# EAGLE board Project_04_Board (EAGLE 9.6.2)
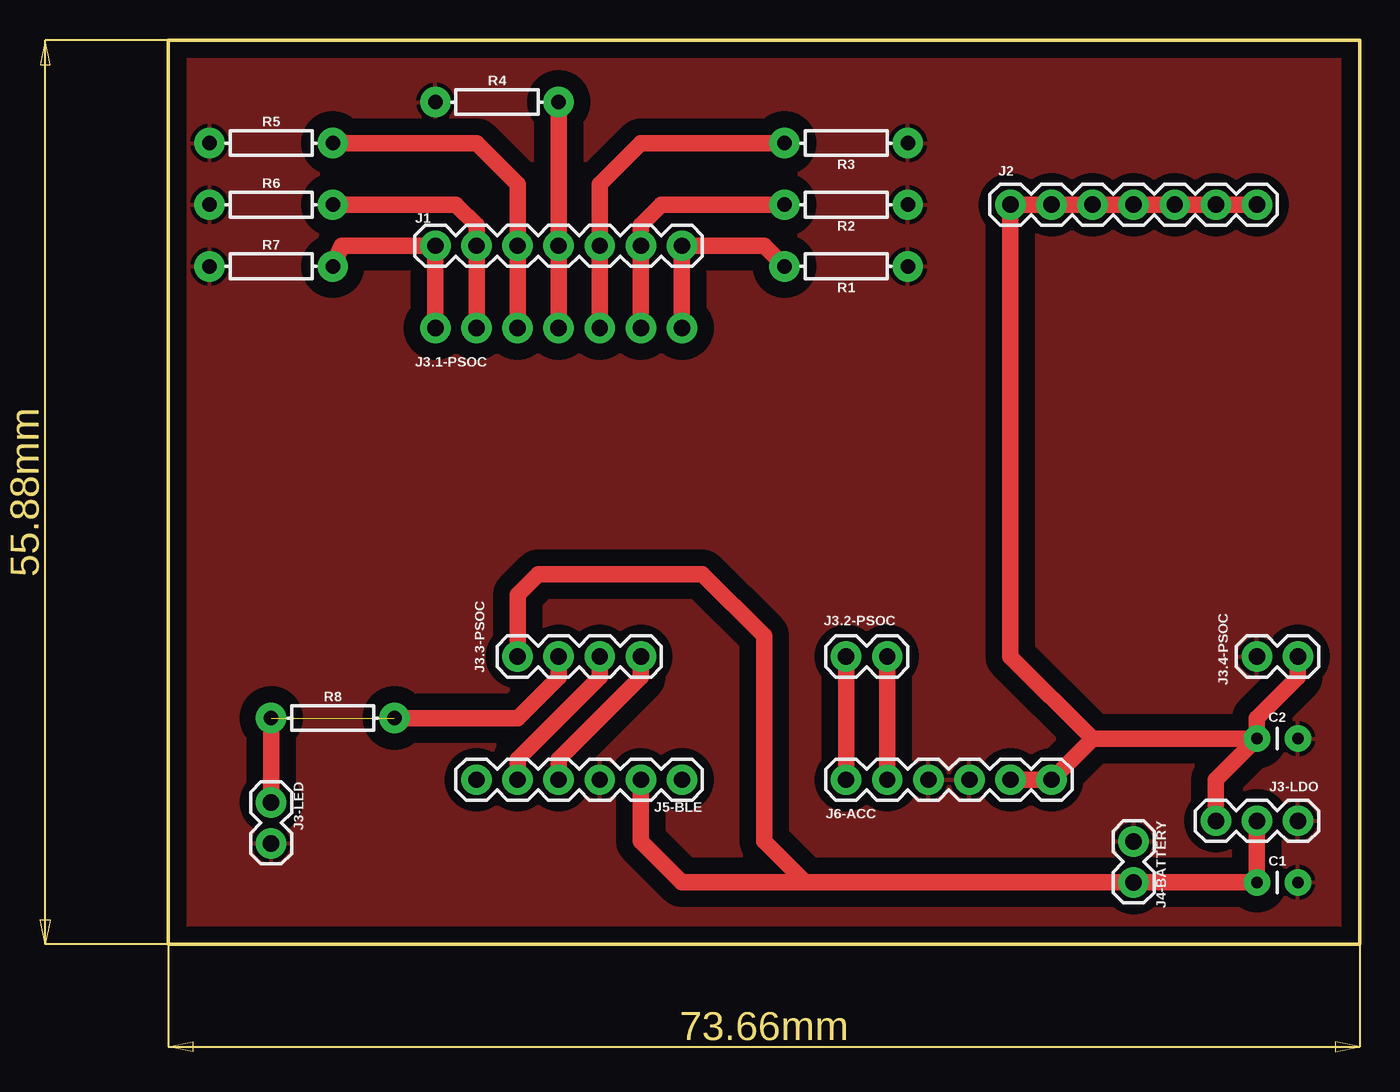
[diagram p0: board, top side]
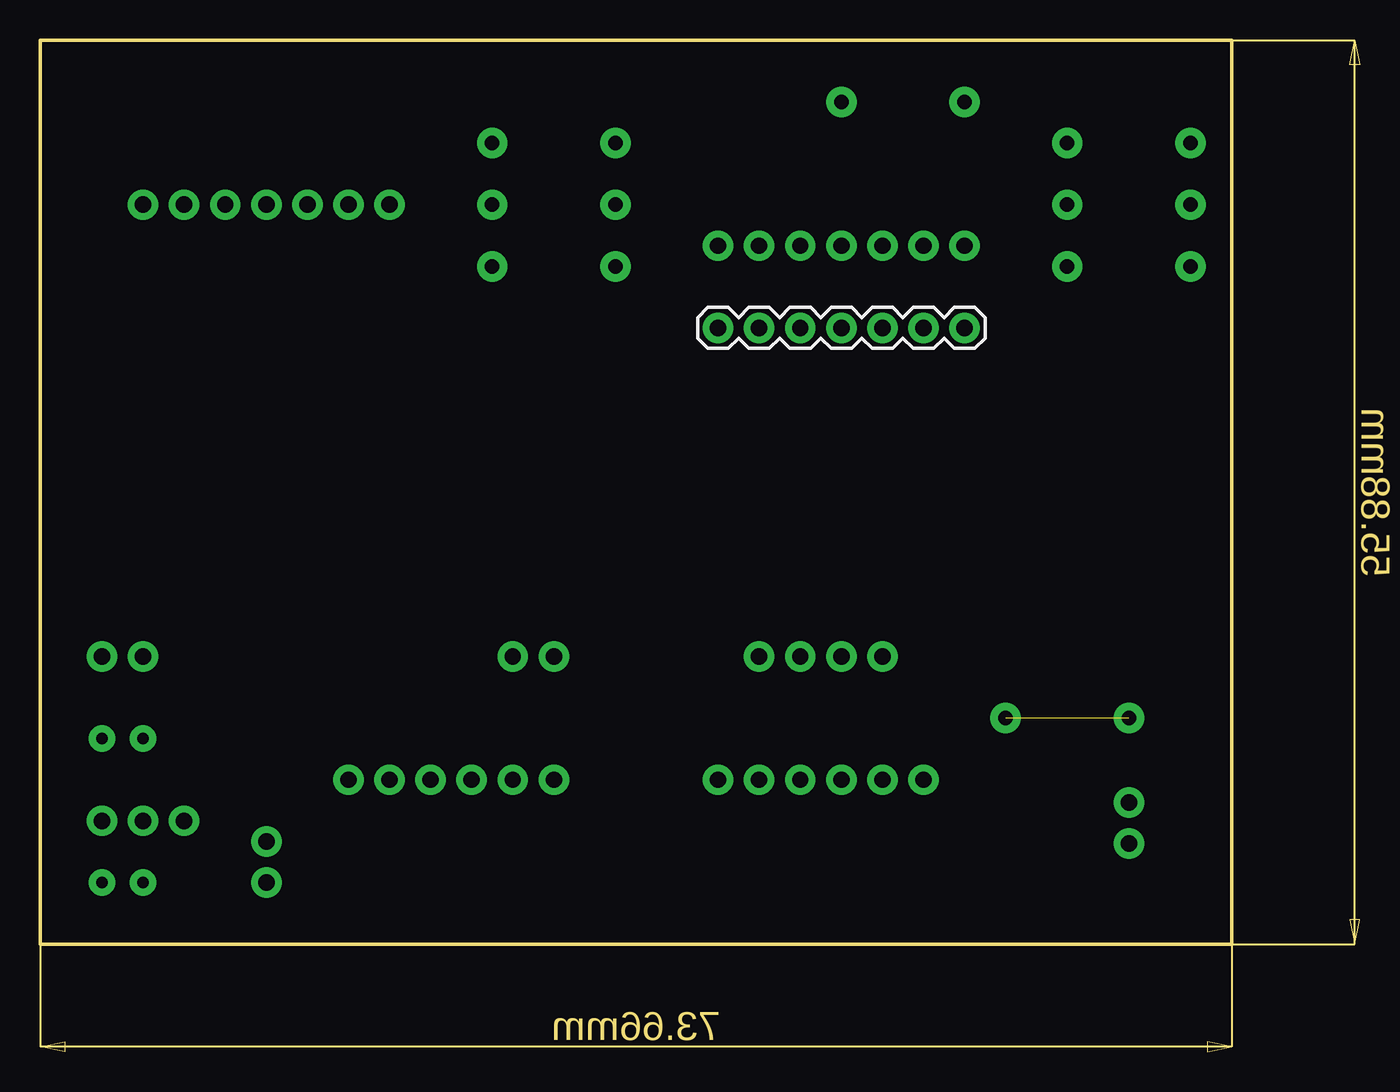
[diagram p1: board, bottom side, seen from below]

Size 73.66 x 55.88 mm. Coordinates in mm from the lower left corner, seen from the top.
Outline: 0,0 73.66,0 73.66,55.88 0,55.88 0,0
Copper layers (1*16): Top 0.035mm / dielectric 1.5mm / Bottom 0.035mm
Design rules "sparkfun": minimum track width 8mil, minimum drill 20mil, track to track 8mil, track to pad 8mil, pad to pad 8mil, via to via 8mil, smd to smd 8mil, copper to edge 8mil, drill to drill 8mil, minimum pad ring 12mil, minimum via ring 10mil, stop-mask expansion 4mil, vias tented up to drill 20mil, thermal gap 10mil

## Footprints (pad centres in the part's own frame; a part is rotated, then mirrored left to right if it is on the bottom)
CAP-PTH-2.54 = drill 0.7 pad 1.651: 1 -1.27,0; 2 1.27,0
1X07 = drill 1.016 pad 1.88: 1 0,0; 2 2.54,0; 3 5.08,0; 4 7.62,0; 5 10.16,0; 6 12.7,0; 7 15.24,0
1X03 = drill 1.016 pad 1.88: 1 0,0; 2 2.54,0; 3 5.08,0
1X02 = drill 1.016 pad 1.88: 1 0,0; 2 2.54,0
1X04 = drill 1.016 pad 1.88: 1 0,0; 2 2.54,0; 3 5.08,0; 4 7.62,0
1X06 = drill 1.016 pad 1.88: 1 0,0; 2 2.54,0; 3 5.08,0; 4 7.62,0; 5 10.16,0; 6 12.7,0
AXIAL-0.3 = drill 0.9 pad 1.88: P$1 -3.81,0; P$2 3.81,0

## Placement (x,y rotation side)
C1  1uF  [CAP-PTH-2.54]  68.58,3.81 0 top
C2  1uF  [CAP-PTH-2.54]  68.58,12.7 0 top
J1  [1X07]  16.51,43.18 0 top
J2  [1X07]  52.07,45.72 0 top
J3-LDO  [1X03]  69.85,7.62 180 top
J3-LED  [1X02]  6.35,8.76 270 top
J3.1-PSOC  [1X07]  31.75,38.1 0 bottom
J3.2-PSOC  [1X02]  41.91,17.78 0 top
J3.3-PSOC  [1X04]  21.59,17.78 0 top
J3.4-PSOC  [1X02]  67.31,17.78 0 top
J4-BATTERY  [1X02]  59.69,6.35 270 top
J5-BLE  [1X06]  31.75,10.16 180 top
J6-ACC  [1X06]  41.91,10.16 0 top
R1  27K  [AXIAL-0.3]  41.91,41.91 180 top
R2  27K  [AXIAL-0.3]  41.91,45.72 180 top
R3  27K  [AXIAL-0.3]  41.91,49.53 180 top
R4  27K  [AXIAL-0.3]  20.32,52.07 0 top
R5  27K  [AXIAL-0.3]  6.35,49.53 0 top
R6  10K  [AXIAL-0.3]  6.35,45.72 0 top
R7  10K  [AXIAL-0.3]  6.35,41.91 0 top
R8  330  [AXIAL-0.3]  10.16,13.97 0 top

## Library data of the parts
C1 C2 = SparkFun-Capacitors; PROD_ID: CAP-09128
J1 J2 J3-LED J3.1-PSOC J3.2-PSOC J3.4-PSOC J4-BATTERY = SparkFun-Connectors
J3-LDO = SparkFun-Connectors; PROD_ID: XXX-00000
J3.3-PSOC = SparkFun-Connectors; PROD_ID: CONN-09696
J5-BLE J6-ACC = SparkFun-Connectors; PROD_ID: CONN-08437
R1-R8 = SparkFun-Resistors

## Nets
3.3V: C2.1 J2.1 J2.2 J2.3 J2.4 J2.5 J2.6 J2.7 J3-LDO.3 J3.4-PSOC.2 J6-ACC.5 J6-ACC.6
4.5V: C1.1 J3-LDO.2 J3.3-PSOC.1 J4-BATTERY.2 J5-BLE.2
GND: C1.2 C2.2 J3-LDO.1 J3-LED.2 J3.4-PSOC.1 J4-BATTERY.1 J5-BLE.3 J6-ACC.3 J6-ACC.4 R1.P$1 R2.P$1 R3.P$1 R4.P$1 R5.P$1 R6.P$1 R7.P$1
R1: J1.7 J3.1-PSOC.1 R1.P$2
R2: J1.6 J3.1-PSOC.2 R2.P$2
R3: J1.5 J3.1-PSOC.3 R3.P$2
R4: J1.4 J3.1-PSOC.4 R4.P$2
R5: J1.3 J3.1-PSOC.5 R5.P$2
R6: J1.2 J3.1-PSOC.6 R6.P$2
R7: J1.1 J3.1-PSOC.7 R7.P$2
RLED: J3-LED.1 J3.3-PSOC.2 R8.P$1 R8.P$2
RX: J3.3-PSOC.3 J5-BLE.5
SCL: J3.2-PSOC.2 J6-ACC.2
SDA: J3.2-PSOC.1 J6-ACC.1
TX: J3.3-PSOC.4 J5-BLE.4

## Tracks (layer width: path | path; a pad name or v marks a point on that pad's centre or on a via)
3.3V
  Top 1.016: J6-ACC.5 J6-ACC.6 57.15,12.7 | J3-LDO.3 64.77,10.16 C2.1 | C2.1 57.15,12.7 | J2.7 J2.6 J2.5 J2.4 J2.3 J2.2 J2.1 52.07,17.78 57.15,12.7 | C2.1 67.31,13.97 69.85,16.51 J3.4-PSOC.2
4.5V
  Top 1.016: J3-LDO.2 C1.1 J4-BATTERY.2 39.37,3.81 | 39.37,3.81 31.75,3.81 29.21,6.35 J5-BLE.2 | J3.3-PSOC.1 21.59,21.59 22.86,22.86 33.02,22.86 36.83,19.05 36.83,6.35 39.37,3.81
GND
  pour Top (isolate 1.016): 0,0 73.66,0 73.66,55.88 0,55.88
R1
  Top 1.016: J3.1-PSOC.1 J1.7 36.83,43.18 R1.P$2
R2
  Top 1.016: J3.1-PSOC.2 J1.6 29.21,44.45 30.48,45.72 R2.P$2
R3
  Top 1.016: J3.1-PSOC.3 J1.5 26.67,46.99 29.21,49.53 R3.P$2
R4
  Top 1.016: J3.1-PSOC.4 J1.4 R4.P$2
R5
  Top 1.016: J3.1-PSOC.5 J1.3 21.59,46.99 19.05,49.53 R5.P$2
R6
  Top 1.016: J3.1-PSOC.6 J1.2 19.05,44.45 17.78,45.72 R6.P$2
R7
  Top 1.016: R7.P$2 10.7,43.18 J1.1 J3.1-PSOC.7
RLED  (1 unrouted)
  Top 1.016: J3.3-PSOC.2 24.13,16.51 21.59,13.97 R8.P$2 | R8.P$1 J3-LED.1
RX
  Top 1.016: J3.3-PSOC.3 26.67,16.51 21.59,11.43 J5-BLE.5
SCL
  Top 1.016: J3.2-PSOC.2 J6-ACC.2
SDA
  Top 1.016: J3.2-PSOC.1 J6-ACC.1
TX
  Top 1.016: J3.3-PSOC.4 29.21,16.51 24.13,11.43 J5-BLE.4